# Altium PCB pcb.pcbdoc
Units mm, origin at the board's own origin, x right, y up, seen from the top; angles counter-clockwise.
Board outline 110.4 x 85.47 mm, 2 copper layers (Top Layer, Bottom Layer); 6 components, 38 nets, 56 pads, 0 vias.
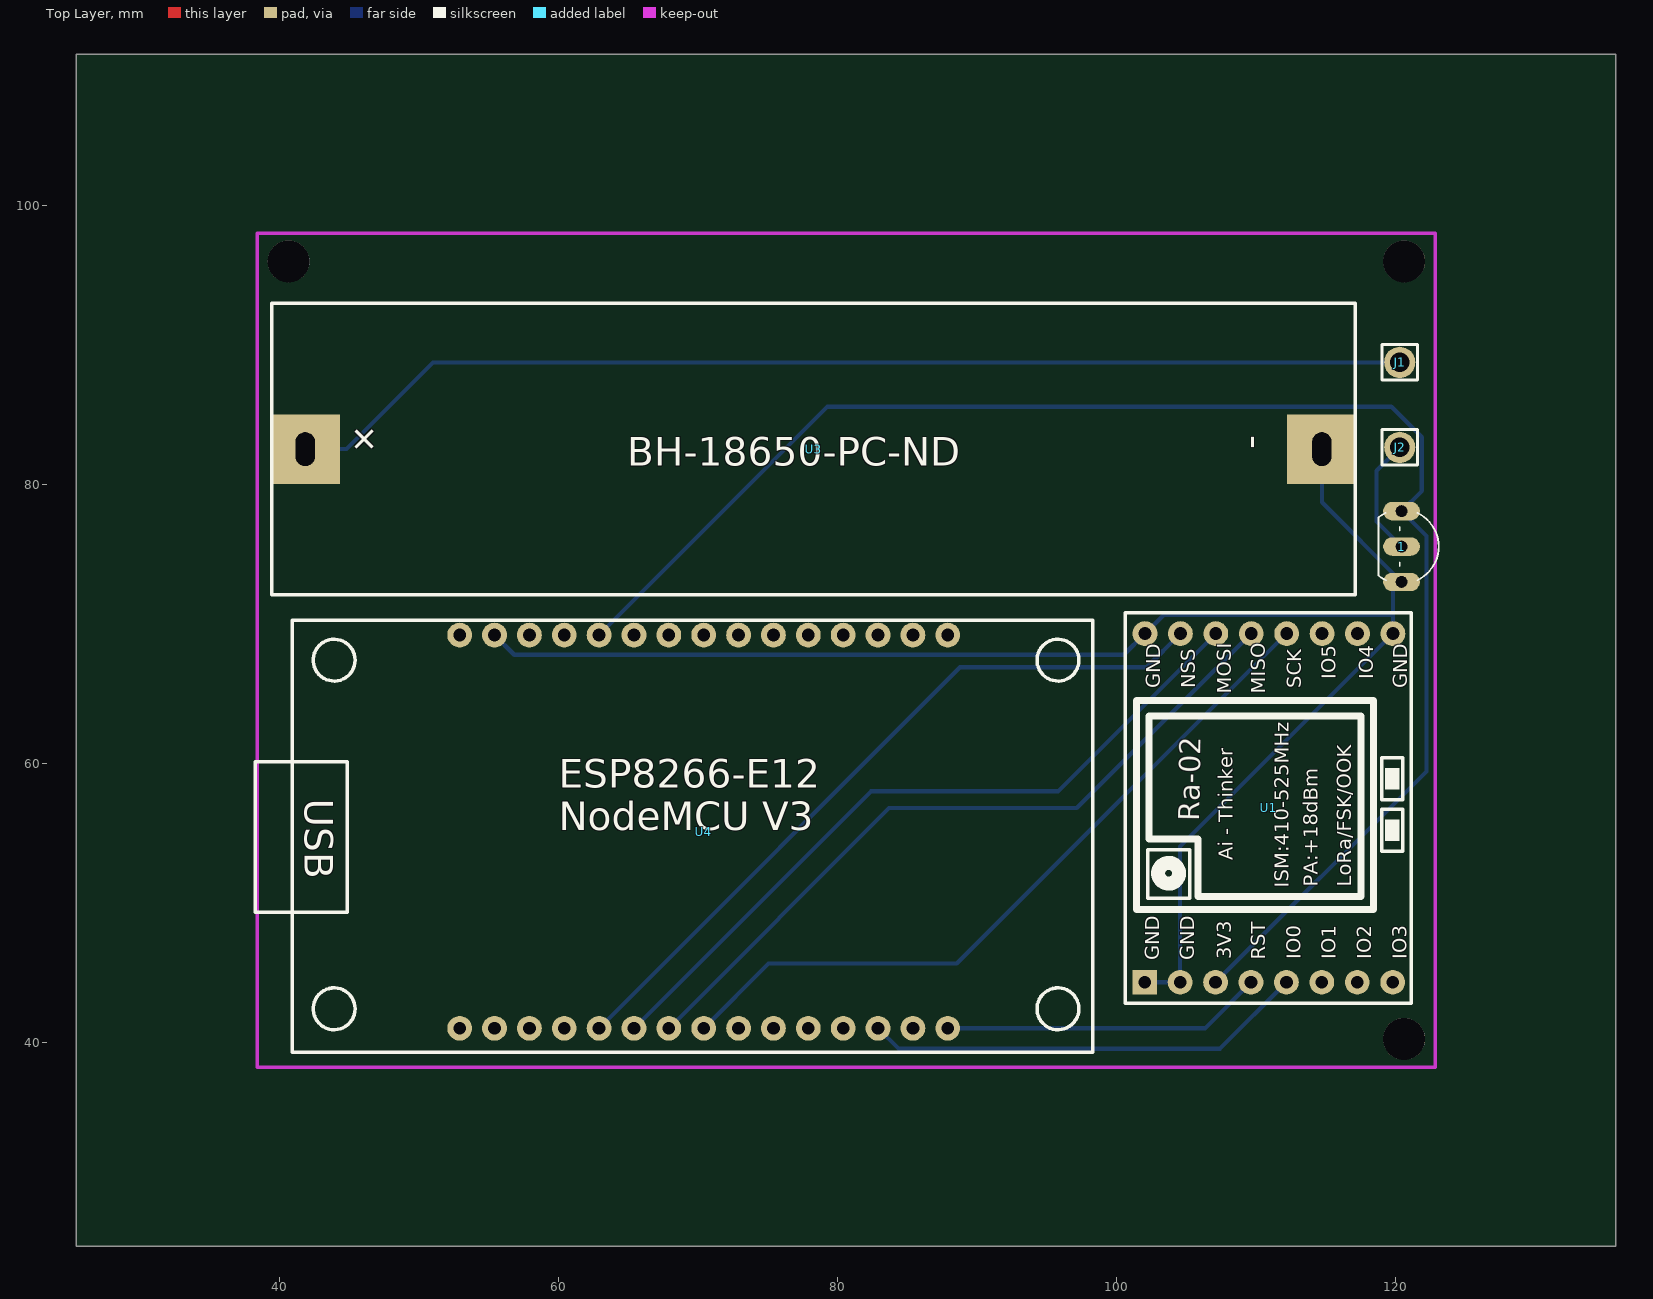
[diagram p0: Top Layer view]
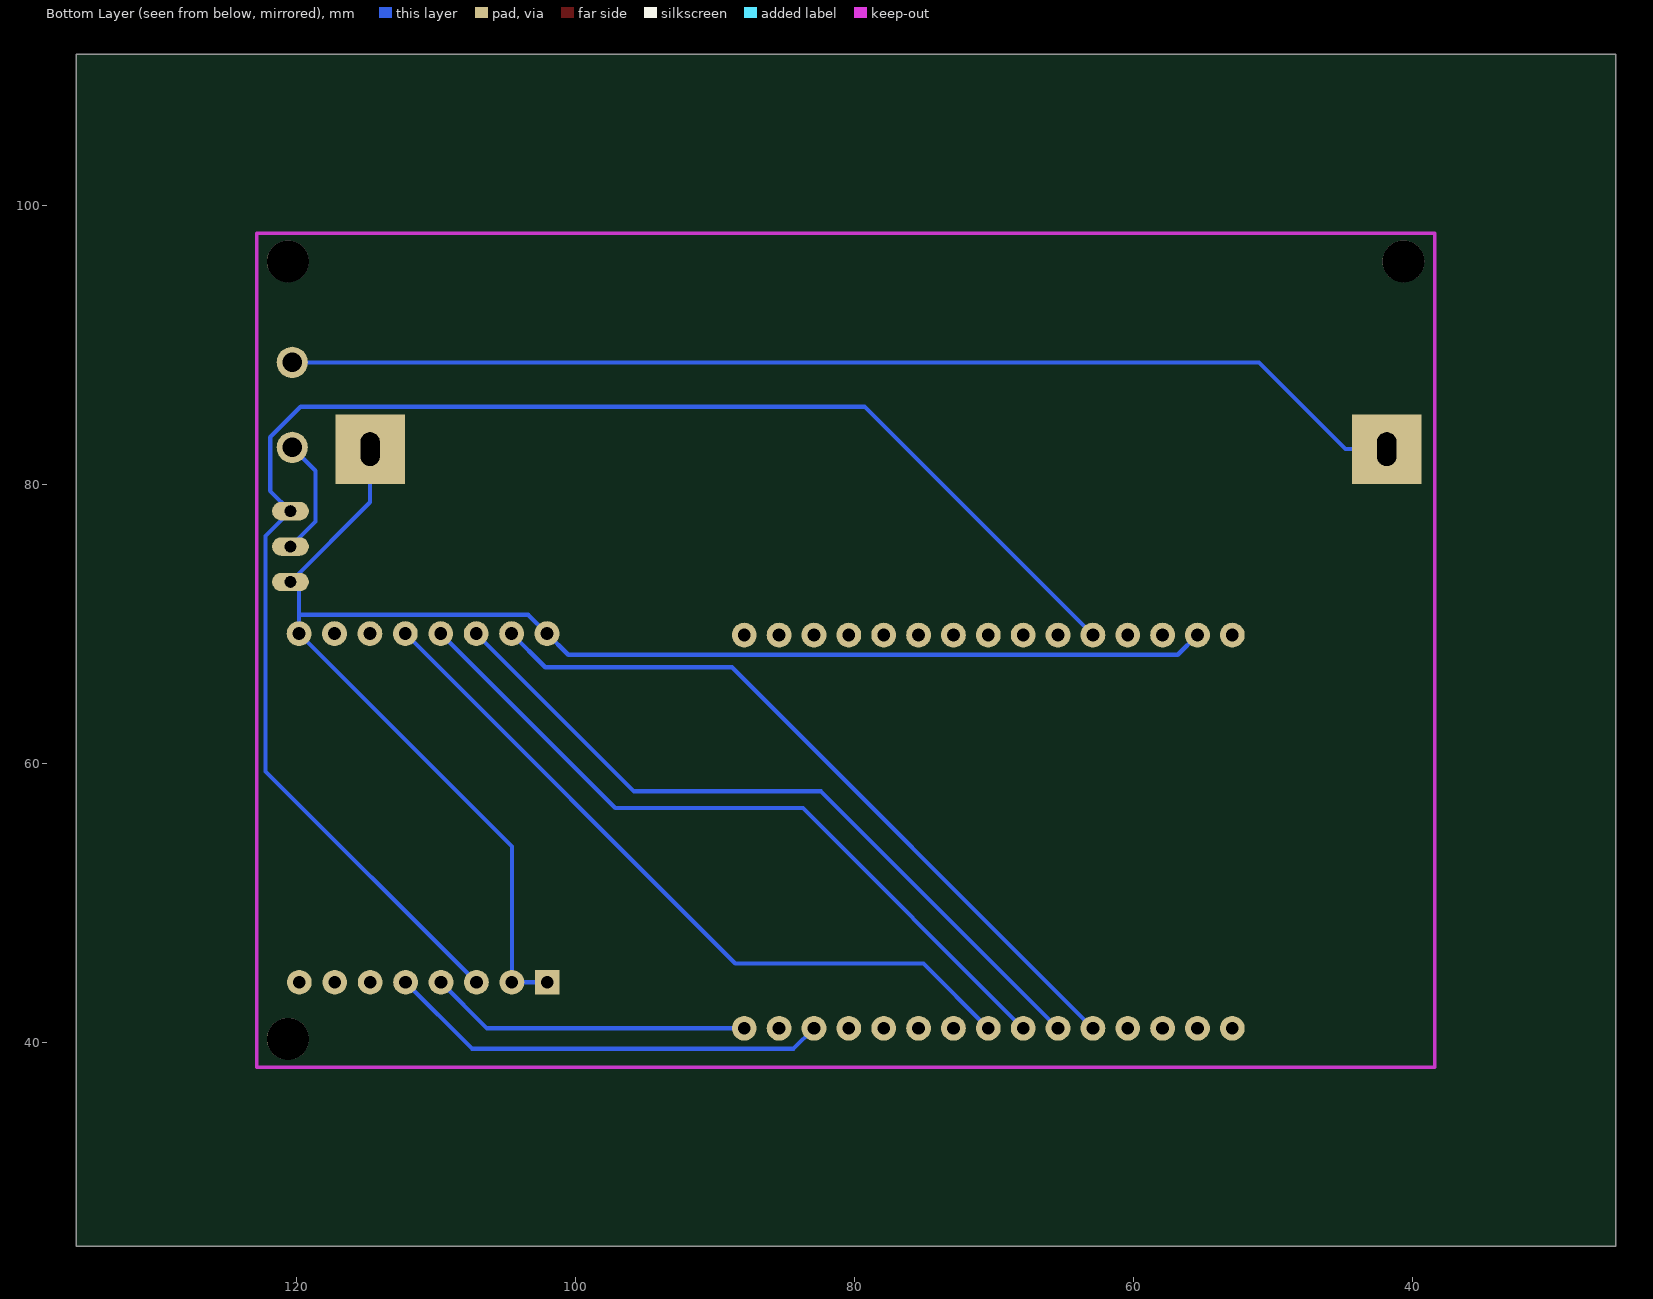
[diagram p1: Bottom Layer view, seen from below]

## Layer stack, top to bottom
Top Layer: signal copper (thickness not stored)
Dielectric: dielectric 0.32, FR-4, Dk 4.8
Bottom Layer: signal copper (thickness not stored)

## Board outline
135.803,25.4 25.4,25.4 25.4,110.871 135.803,110.871

## Components (designator, comment, footprint, x,y, rotation, side; value= is the part's Value field where it differs from the comment)
1 "HT7333-A'" TO92 120.436,75.565 r270 top
J1 "HDR-M-2.54_1x1" HDR-M-2.54_1X1 120.309,88.773 r0 top
J2 "HDR-M-2.54_1x1" HDR-M-2.54_1X1 120.309,82.677 r0 top
U1 "NO" "LORA SX1278 RA-02 WIRELESS MODULE" 102.021,44.323 r90 top
U3 "18650 PLAT X1" "ADAFRUIT 18650 BATTERY HOLDER KFLMIAMI420 BH-18650-PC-ND" 77.383,78.613 r0 top
U4 "ESP8266-E12 NODEMCU V3(Verivied 3)" ESP8266-E12-NODEMCU-V3 70.398,55.118 r270 top

## Footprints (in the part's own frame and the unit in brackets; to place one, negate y for a bottom-side part, rotate by r counter-clockwise, add the part's x,y. Pads: shape width x height; smd on the part's side, far side on the other; paste and mask are expansions set on the pad)
"ADAFRUIT 18650 BATTERY HOLDER KFLMIAMI420 BH-18650-PC-ND" [mm]
  rect 5x5 hole 1.38 slot 2.4 at 90 deg unplated paste+0 mask+0.102: 1(-35.56,3.937) 2(37.34,3.937)
  silkscreen extent -37.96,-6.51 39.74,14.39
ESP8266-E12-NODEMCU-V3 [mil]
  round 70 hole 36 unplated paste+0 mask+2: 1(-555.12,688.98) 2(-555.12,590.55) 3(-555.12,492.13) 4(-555.12,393.7) 5(-555.12,295.28) 6(-555.12,196.85) 7(-555.12,98.43) 8(-555.12,0) 9(-555.12,-98.42) 10(-555.12,-196.85) 11(-555.12,-295.28) 12(-555.12,-393.7) 13(-555.12,-492.13) 14(-555.12,-590.55) 15(-555.12,-688.98) 16(555.12,688.98) 17(555.12,590.55) 18(555.12,492.13) 19(555.12,393.7) 20(555.12,295.28) 21(555.12,196.85) 22(555.12,98.43) 23(555.12,0) 24(555.12,-98.42) 25(555.12,-196.85) 26(555.12,-295.27) 27(555.12,-393.7) 28(555.12,-492.12) 29(555.12,-590.55) 30(555.12,-688.98)
  silkscreen extent -597,-1267 623,1098
HDR-M-2.54_1X1 [mm]
  round 2.24 hole 1.38 unplated paste+0 mask+0.051: 1(0,0)
  silkscreen extent -1.27,-1.27 1.27,1.27
"LORA SX1278 RA-02 WIRELESS MODULE" [mil]
  rect 70x70 hole 36 unplated paste+0 mask+2: 1(0,0)
  round 70 hole 36 unplated paste+0 mask+2: 2(0,-100) 3(0,-200) 4(0,-300) 5(0,-400) 6(0,-500) 7(0,-600) 8(0,-700)
  round 70 hole 36 unplated paste+0 mask+4: 9(984.25,-700.79) 10(984.25,-600.79) 11(984.25,-500.79) 12(984.25,-400.79) 13(984.25,-300.79) 14(984.25,-200.79) 15(984.25,-100.79) 16(984.25,-0.79)
  silkscreen extent -59,-752 1043,55
TO92 [mil]
  oval 52x104 hole 32 slot 32.2 at 90 deg unplated paste+0 mask+2: GND(100,0) IN(0,0) OUT(-100,0)
  silkscreen extent -95,-65 95,105

## Free pads (board coordinates)
  round 3 hole 3 unplated paste+0: ""(40.626,96.012) ""(120.617,40.259) ""(120.617,96.012)

## Nets (pads, with @x,y where several pads share a name; then routed paths per layer and width w, separated by ;. In a path a pad name is that pad's centre, name@x,y a point inside that pad or via, vN(x,y) a via of type N, cw(c..) or ccw(c..) an arc to the next point about the centre after c; other vN are vias at no path point)
J1_1: J1.1 U3.1 | length 81.1
  Bottom Layer w0.3: U3.1 44.774,82.55 50.997,88.773 J1.1
J2_1: 1.IN J2.1 | length 8.6
  Bottom Layer w0.3: J2.1 118.633,81.001 118.633,77.368 1.IN
S$5692: 
U1_1: 1.GND U1.1 U1.2 U1.9 U1.16 U3.2 U4.14 | length 115.9
  Bottom Layer w0.3: U4.14 56.814,67.803 100.521,67.803 102.041,69.323 103.392,70.673 119.821,70.673 ; U1.1 U1.2 104.561,54.063 119.821,69.323 119.821,70.673 ; U3.2 114.723,78.738 1.GND 119.821,72.41 119.821,70.673
U1_3: 1.OUT U1.3 U4.11 | length 113.4
  Bottom Layer w0.3: U4.11 79.275,85.595 119.703,85.595 121.893,83.404 121.893,79.562 1.OUT 122.221,76.32 122.221,59.443 U1.3
U1_4: U1.4 U4.16 | length 23.1
  Bottom Layer w0.3: U4.16 106.336,41.018 U1.4
U1_5: U1.5 U4.18 | length 31.9
  Bottom Layer w0.3: U4.18 84.358,39.558 107.416,39.558 U1.5
U1_6: U1.6
U1_7: U1.7
U1_8: U1.8
U1_10: U1.10
U1_11: U1.11
U1_12: U1.12 U4.23 | length 53.5
  Bottom Layer w0.3: U4.23 75.044,45.664 88.542,45.664 U1.12@112.201,69.323
U1_13: U1.13 U4.24 | length 53.5
  Bottom Layer w0.3: U4.24 83.693,56.813 97.151,56.813 U1.13@109.661,69.323
U1_14: U1.14 U4.25 | length 53.4
  Bottom Layer w0.3: U4.25 82.392,58.012 95.81,58.012 U1.14@107.121,69.323
U1_15: U1.15 U4.26 | length 53.4
  Bottom Layer w0.3: U4.26 88.787,66.907 102.165,66.907 U1.15@104.581,69.323
U4_1: U4.1
U4_2: U4.2
U4_3: U4.3
U4_4: U4.4
U4_5: U4.5
U4_6: U4.6
U4_7: U4.7
U4_8: U4.8
U4_9: U4.9
U4_10: U4.10
U4_12: U4.12
U4_13: U4.13
U4_15: U4.15
U4_17: U4.17
U4_19: U4.19
U4_20: U4.20
U4_21: U4.21
U4_22: U4.22
U4_27: U4.27
U4_28: U4.28
U4_29: U4.29
U4_30: U4.30

## Text inside footprints (layer, text, board x,y; h text height)
U1: Top Overlay "Ra-02" at 105.946,55.867 h1.5 r89; Top Overlay "Ai - Thinker" at 108.345,53.088 h1.02 r90; Top Overlay "ISM:410-525MHz" at 112.345,51.088 h1.02 r90; Top Overlay "PA:+18dBm" at 114.445,51.188 h1.02 r90; Top Overlay "LoRa/FSK/OOK" at 116.845,51.188 h1.02 r90; Top Overlay "GND" at 103.077,45.882 h1.02 r90; Top Overlay "GND" at 105.577,45.882 h1.02 r90; Top Overlay "3V3" at 108.244,45.974 h1.02 r90; Top Overlay "RST" at 110.677,45.928 h1.02 r90; Top Overlay "IO0" at 113.197,45.974 h1.02 r90; Top Overlay "IO1" at 115.737,45.974 h1.02 r90; Top Overlay "IO2" at 118.277,45.974 h1.02 r90; Top Overlay "IO3" at 120.817,45.974 h1.02 r90; Top Overlay "GND" at 120.837,65.405 h1.02 r90; Top Overlay "IO4" at 118.404,66.04 h1.02 r90; Top Overlay "IO5" at 115.737,66.04 h1.02 r90; Top Overlay "SCK" at 113.237,65.405 h1.02 r90; Top Overlay "MISO" at 110.657,65.024 h1.02 r90; Top Overlay "MOSI" at 108.244,65.024 h1.02 r90; Top Overlay "NSS" at 105.637,65.405 h1.02 r90; Top Overlay "GND" at 103.137,65.406 h1.02 r90
U3: Top Overlay "-" at 110.53,82.55 h2.03 r90; Top Overlay "+" at 45.843,81.832 h2.03 r45; Top Overlay "BH-18650-PC-ND" at 64.923,81.374 h2.03
U4: Top Overlay "ESP8266-E12 / NodeMCU V3" at 60.012,55.214 h2.03; Top Overlay "USB" at 41.783,57.464 h2.03 r270